# EAGLE board proj1 (EAGLE 6.4)
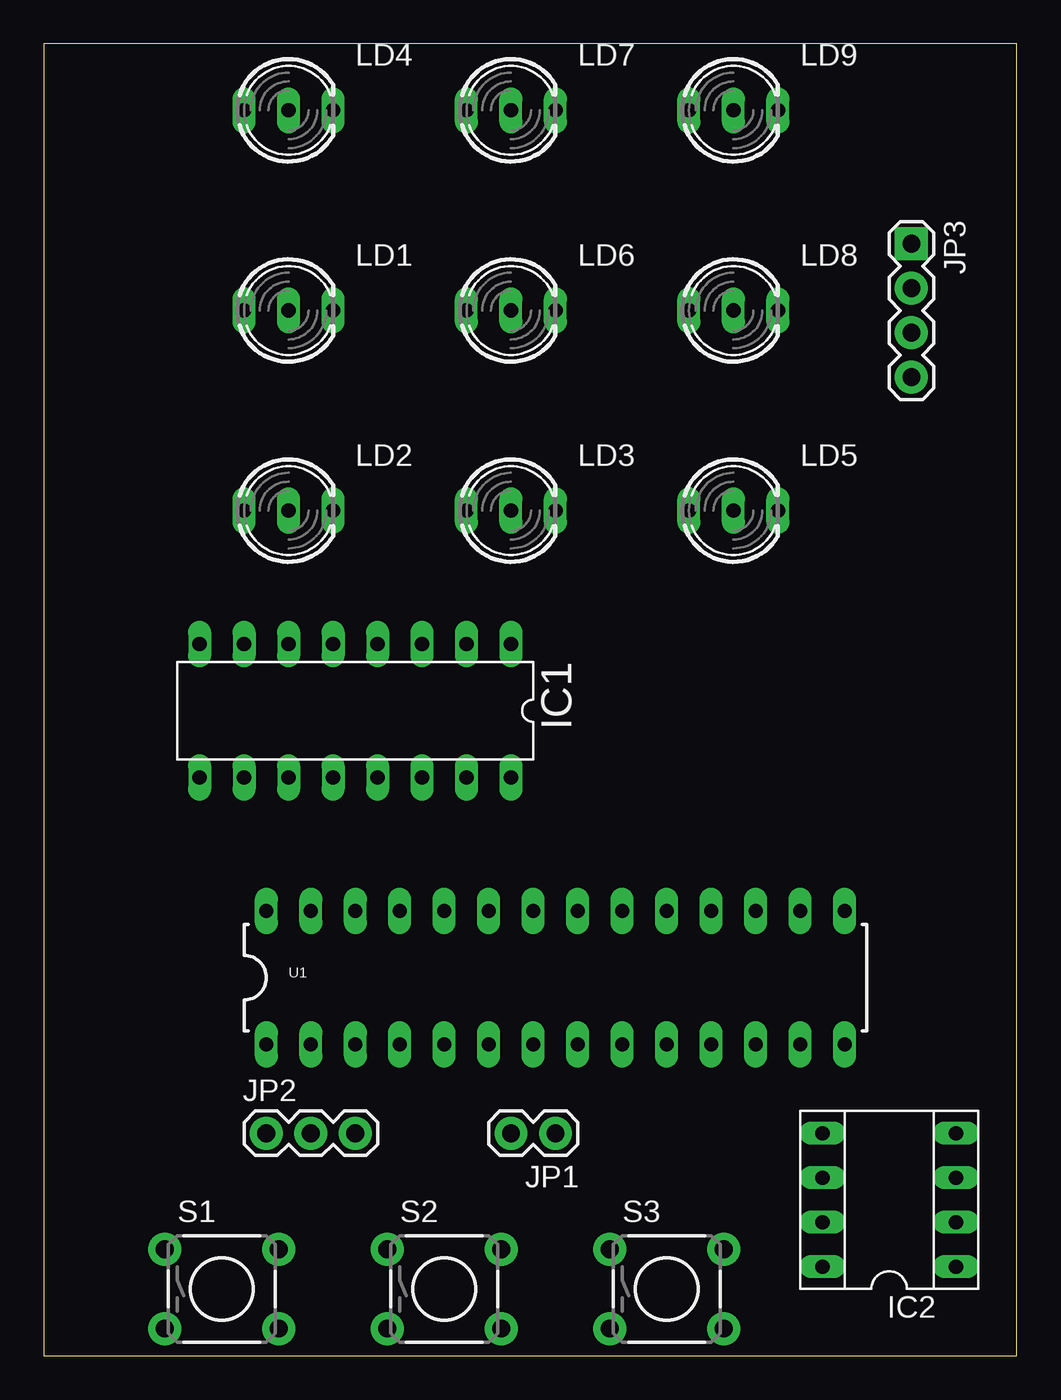
[diagram p0: board, top side]
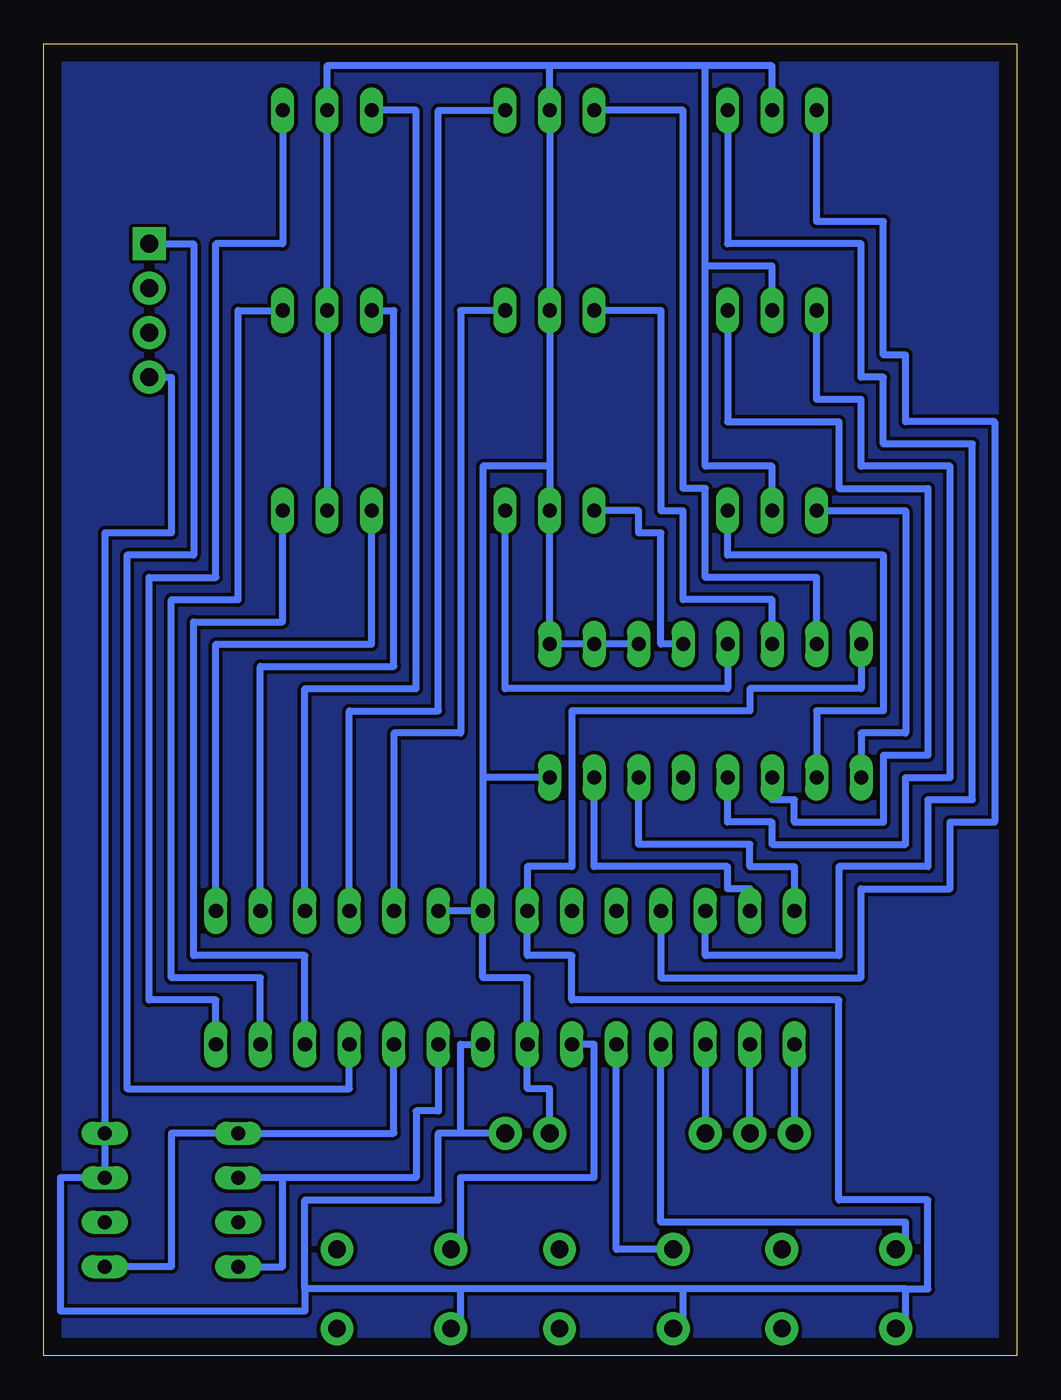
[diagram p1: board, bottom side, seen from below]

Size 55.55 x 74.92 mm. Coordinates in mm from the lower left corner, seen from the top.
Outline: 0,0 55.55,0 55.55,74.92 0,74.92 0,0
Copper layers (1*16): Top 0.035mm / dielectric 1.5mm / Bottom 0.035mm
Design rules "default": minimum track width 10mil, minimum drill 24mil, track to track 8mil, track to pad 8mil, pad to pad 8mil, via to via 8mil, smd to smd 8mil, copper to edge 40mil, drill to drill 8mil, minimum pad ring 10mil, minimum via ring 8mil, stop-mask expansion 4mil, vias tented up to drill 0mil, thermal gap 10mil

## Footprints (pad centres in the part's own frame; a part is rotated, then mirrored left to right if it is on the bottom)
DIL16 = drill 0.813 long: 1 -8.89,-3.81; 2 -6.35,-3.81; 3 -3.81,-3.81; 4 -1.27,-3.81; 5 1.27,-3.81; 6 3.81,-3.81; 7 6.35,-3.81; 8 8.89,-3.81; 9 8.89,3.81; 10 6.35,3.81; 11 3.81,3.81; 12 1.27,3.81; 13 -1.27,3.81; 14 -3.81,3.81; 15 -6.35,3.81; 16 -8.89,3.81
SOCKET-08 = drill 0.813 long: 1 -3.81,-3.81; 2 -1.27,-3.81; 3 1.27,-3.81; 4 3.81,-3.81; 5 3.81,3.81; 6 1.27,3.81; 7 -1.27,3.81; 8 -3.81,3.81
1X02 = drill 1.016 pad 1.88: 1 0,0; 2 2.54,0
1X03 = drill 1.016 pad 1.88: 1 0,0; 2 2.54,0; 3 5.08,0
1X04 = drill 1.016 pad 1.88 square: 1 0,0 | drill 1.016 pad 1.88: 2 2.54,0; 3 5.08,0; 4 7.62,0
DUOLED-C-5MM = drill 0.813 long: AR 2.54,0; AX -2.54,0; C 0,0
TACTILE-PTH = drill 1.016 pad 1.88: 1 -3.251,2.261; 2 3.251,2.261; 3 -3.251,-2.261; 4 3.251,-2.261
DIL28-3 = drill 0.813 long: 1 -16.51,-3.81; 2 -13.97,-3.81; 3 -11.43,-3.81; 4 -8.89,-3.81; 5 -6.35,-3.81; 6 -3.81,-3.81; 7 -1.27,-3.81; 8 1.27,-3.81; 9 3.81,-3.81; 10 6.35,-3.81; 11 8.89,-3.81; 12 11.43,-3.81; 13 13.97,-3.81; 14 16.51,-3.81; 15 16.51,3.81; 16 13.97,3.81; 17 11.43,3.81; 18 8.89,3.81; 19 6.35,3.81; 20 3.81,3.81; 21 1.27,3.81; 22 -1.27,3.81; 23 -3.81,3.81; 24 -6.35,3.81; 25 -8.89,3.81; 26 -11.43,3.81; 27 -13.97,3.81; 28 -16.51,3.81

## Placement (x,y rotation side)
IC1  PCF8574P  [DIL16]  17.78,36.83 180 top
IC2  [SOCKET-08]  48.26,8.89 90 top
JP1  M02PTH  [1X02]  29.21,12.7 180 top
JP2  [1X03]  12.7,12.7 0 top
JP3  [1X04]  49.53,63.5 270 top
LD1  [DUOLED-C-5MM]  13.97,59.69 0 top
LD2  [DUOLED-C-5MM]  13.97,48.26 0 top
LD3  [DUOLED-C-5MM]  26.67,48.26 0 top
LD4  [DUOLED-C-5MM]  13.97,71.12 0 top
LD5  [DUOLED-C-5MM]  39.37,48.26 0 top
LD6  [DUOLED-C-5MM]  26.67,59.69 0 top
LD7  [DUOLED-C-5MM]  26.67,71.12 0 top
LD8  [DUOLED-C-5MM]  39.37,59.69 0 top
LD9  [DUOLED-C-5MM]  39.37,71.12 0 top
S1  [TACTILE-PTH]  10.16,3.81 0 top
S2  [TACTILE-PTH]  22.86,3.81 0 top
S3  [TACTILE-PTH]  35.56,3.81 0 top
U1  ATMEGA328P_PDIP  [DIL28-3]  29.21,21.59 0 top

## Library data of the parts
IC1 = micro-philips; MPN: PCF8574PN; OC_FARNELL: 204020; OC_NEWARK: 11N8515
IC2 = ic-package
JP1-JP3 = SparkFun-Connectors
LD1-LD9 = led
S1-S3 = SparkFun-Electromechanical
U1 = SparkFun-DigitalIC

## Nets
BTN0: S1.1 U1.4
BTN1: S2.1 U1.5
BTN2: S3.1 U1.6
LED0_1: LD4.AX U1.25
LED0_2: LD4.AR U1.26
LED1_1: IC1.7 LD7.AX
LED1_2: LD7.AR U1.18
LED2_2: LD9.AR U1.14
LED3_1: IC1.12 LD1.AX
LED3_2: IC1.11 LD1.AR
LED4_1: IC1.6 LD6.AX
LED4_2: LD6.AR
LED5_1: LD8.AX U1.16
LED5_2: LD8.AR U1.13
LED6_1: IC1.9 LD2.AX
LED6_2: IC1.10 LD2.AR
LED7_1: IC1.4 LD3.AX
LED7_2: IC1.5 LD3.AR
LED8_1: LD5.AX U1.15
LED8_2: LD5.AR U1.12
N$2: JP2.1 U1.1
N$7: IC2.6 IC2.8 U1.9
N$8: IC2.1 IC2.5 U1.10
N$9: IC1.1 IC1.3 IC1.16 JP1.2 LD1.C LD2.C LD3.C LD4.C LD5.C LD6.C LD7.C LD8.C LD9.C U1.7 U1.20 U1.21
N$17: LD9.AX U1.17
N$32: IC1.8 IC2.3 IC2.4 JP3.4 S1.3 S2.3 S3.3 U1.22
PIEZO: JP3.1 U1.11
S$2: JP2.2 U1.2
S$7: U1.8
S$8: JP1.1
S$9: IC1.14 U1.28
S$10: IC1.15 U1.27
S$12: JP2.3 U1.3

## Tracks (layer width: path | path; a pad name or v marks a point on that pad's centre or on a via)
BTN0
  Bottom 0.406: S1.1 6.35,6.07 6.35,7.62 20.32,7.62 U1.4
BTN1
  Bottom 0.406: S2.1 22.86,6.07 U1.5
BTN2
  Bottom 0.406: S3.1 31.75,6.07 31.75,10.16 24.13,10.16 24.13,17.78 U1.6
LED0_1
  Bottom 0.406: U1.25 20.32,21.59 8.89,21.59 8.89,26.67 3.81,26.67 3.81,30.48 1.27,30.48 1.27,53.34 6.35,53.34 6.35,57.15 7.62,57.15 7.62,64.77 11.43,64.77 LD4.AX
LED0_2
  Bottom 0.406: LD4.AR 16.51,63.5 8.89,63.5 8.89,55.88 7.62,55.88 7.62,52.07 2.54,52.07 2.54,31.75 5.08,31.75 5.08,27.94 10.16,27.94 10.16,22.86 17.78,22.86 U1.26
LED1_1
  Bottom 0.406: IC1.7 11.43,44.45 17.78,44.45 17.78,49.53 19.05,49.53 19.05,71.12 LD7.AX
LED1_2
  Bottom 0.406: U1.18 38.1,36.83 33.02,36.83 33.02,71.12 LD7.AR
LED2_2
  Bottom 0.406: U1.14 45.72,20.32 49.53,20.32 49.53,44.45 45.72,44.45 45.72,63.5 41.91,63.5 LD9.AR
LED3_1
  Bottom 0.406: IC1.12 16.51,30.48 13.97,30.48 13.97,29.21 6.35,29.21 6.35,33.02 3.81,33.02 3.81,50.8 8.89,50.8 8.89,54.61 11.43,54.61 LD1.AX
LED3_2
  Bottom 0.406: IC1.11 13.97,31.75 12.7,31.75 12.7,30.48 7.62,30.48 7.62,34.29 5.08,34.29 5.08,49.53 10.16,49.53 10.16,53.34 16.51,53.34 LD1.AR
LED4_1
  Bottom 0.406: IC1.6 13.97,43.18 19.05,43.18 19.05,48.26 20.32,48.26 20.32,59.69 LD6.AX
LED4_2
  Bottom 0.406: LD6.AR 31.75,59.69 31.75,35.56 35.56,35.56 35.56,25.4
LED5_1
  Bottom 0.406: U1.16 43.18,39.37 35.56,39.37 35.56,59.69 LD8.AX
LED5_2
  Bottom 0.406: U1.13 43.18,21.59 48.26,21.59 48.26,43.18 44.45,43.18 44.45,59.69 LD8.AR
LED6_1
  Bottom 0.406: LD2.AX 6.35,48.26 6.35,35.56 8.89,35.56 IC1.9
LED6_2
  Bottom 0.406: LD2.AR 16.51,45.72 7.62,45.72 7.62,36.83 11.43,36.83 IC1.10
LED7_1
  Bottom 0.406: IC1.4 20.32,40.64 20.32,46.99 21.59,46.99 21.59,48.26 LD3.AX
LED7_2
  Bottom 0.406: IC1.5 16.51,38.1 29.21,38.1 LD3.AR
LED8_1
  Bottom 0.406: U1.15 45.72,40.64 36.83,40.64 LD5.AX
LED8_2
  Bottom 0.406: U1.12 40.64,22.86 46.99,22.86 46.99,41.91 41.91,41.91 LD5.AR
N$2
  Bottom 0.406: U1.1 JP2.1
N$7
  Bottom 0.406: 41.91,10.16 34.29,10.16 34.29,13.97 33.02,13.97 U1.9 | 41.91,10.16 IC2.6 | IC2.8 41.91,5.08 41.91,10.16
N$8
  Bottom 0.406: U1.10 35.56,12.7 IC2.5 48.26,12.7 48.26,5.08 IC2.1
N$9
  Bottom 0.406: LD4.C 13.97,73.66 17.78,73.66 | 17.78,73.66 26.67,73.66 | 26.67,50.8 LD6.C LD7.C 26.67,73.66 | 26.67,50.8 LD3.C IC1.1 IC1.3 | 26.67,73.66 39.37,73.66 LD9.C LD8.C LD5.C | LD1.C 13.97,62.23 17.78,62.23 | 17.78,62.23 17.78,50.8 13.97,50.8 LD2.C | 17.78,62.23 17.78,73.66 | 26.67,50.8 30.48,50.8 30.48,33.02 | 30.48,33.02 U1.21 | JP1.2 26.67,15.24 27.94,15.24 U1.7 27.94,21.59 30.48,21.59 U1.21 | U1.21 U1.20 | IC1.16 30.48,33.02
N$17
  Bottom 0.406: U1.17 40.64,38.1 34.29,38.1 34.29,71.12 LD9.AX
N$32
  Bottom 0.406: S1.3 6.35,1.55 6.35,3.81 | 6.35,3.81 19.05,3.81 | 19.05,3.81 31.75,3.81 | S3.3 31.75,1.55 31.75,3.81 | 31.75,3.81 40.64,3.81 | 40.64,3.81 40.64,8.89 33.02,8.89 33.02,12.7 | S2.3 19.05,1.55 19.05,3.81 | 6.35,3.81 5.08,3.81 5.08,8.89 10.16,8.89 10.16,20.32 25.4,20.32 25.4,22.86 27.94,22.86 U1.22 27.94,27.94 25.4,27.94 25.4,36.83 15.24,36.83 15.24,38.1 8.89,38.1 IC1.8 | 40.64,3.81 40.64,2.54 54.61,2.54 54.61,10.16 IC2.3 IC2.4 52.07,46.99 48.26,46.99 48.26,55.88 JP3.4
PIEZO
  Bottom 0.406: U1.11 38.1,15.24 50.8,15.24 50.8,45.72 46.99,45.72 46.99,63.5 JP3.1
S$2
  Bottom 0.406: JP2.2 U1.2
S$7
  Bottom 0.406: U1.8 31.75,17.78 31.75,13.97
S$8
  Bottom 0.406: 30.48,17.78 31.75,17.78 31.75,12.7 | JP1.1 31.75,12.7 | 31.75,12.7 33.02,12.7
S$9
  Bottom 0.406: U1.28 12.7,27.94 15.24,27.94 15.24,29.21 21.59,29.21 IC1.14
S$10
  Bottom 0.406: U1.27 15.24,26.67 16.51,26.67 16.51,27.94 24.13,27.94 IC1.15
S$11
  pour Bottom: 55.88,74.93 0,74.93 0,0 55.88,0
S$12
  Bottom 0.406: U1.3 JP2.3